# Altium PCB PCB_ESPHome Fan.pcbdoc
Units mm, origin at the board's own origin, x right, y up, seen from the top; angles counter-clockwise.
Board outline 99.65 x 76.12 mm, 2 copper layers (Top Layer, Bottom Layer); 13 components, 55 nets, 91 pads, 0 vias.
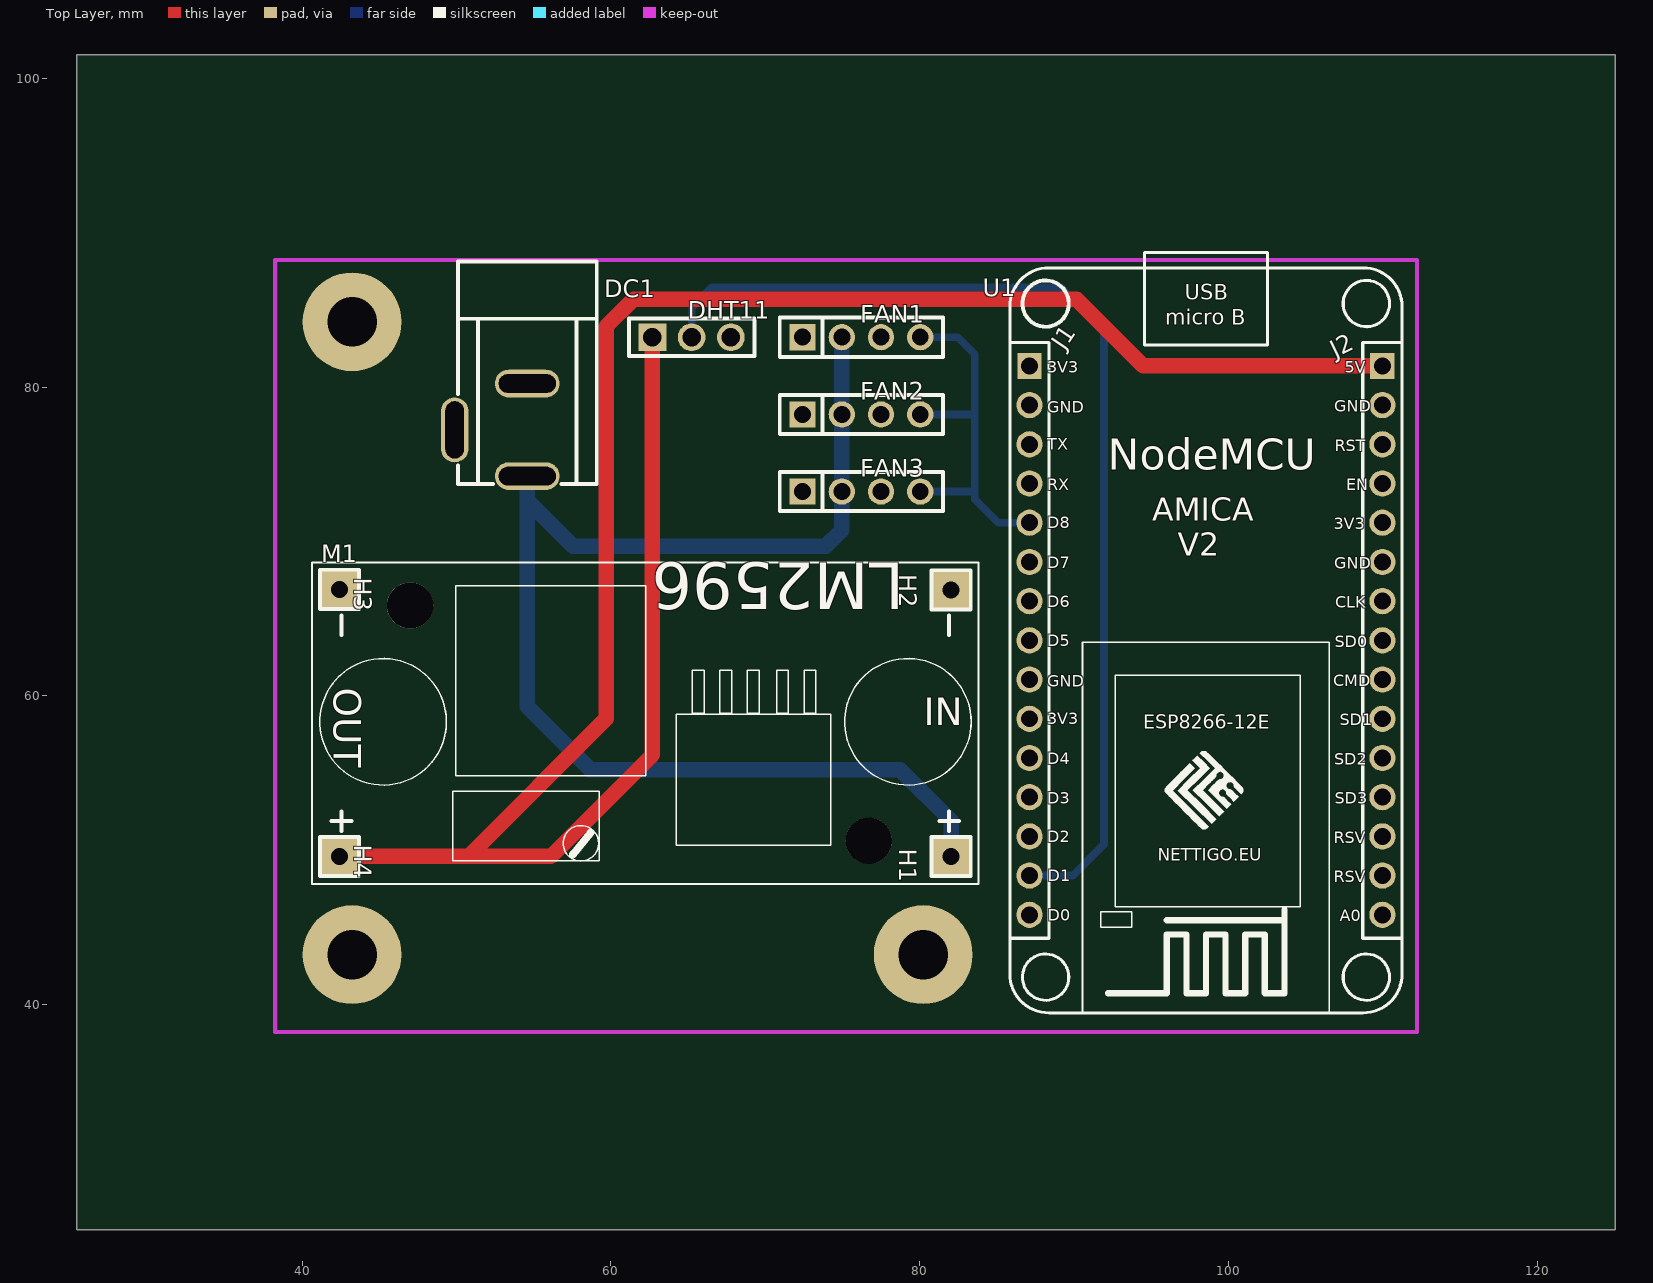
[diagram p0: Top Layer view]
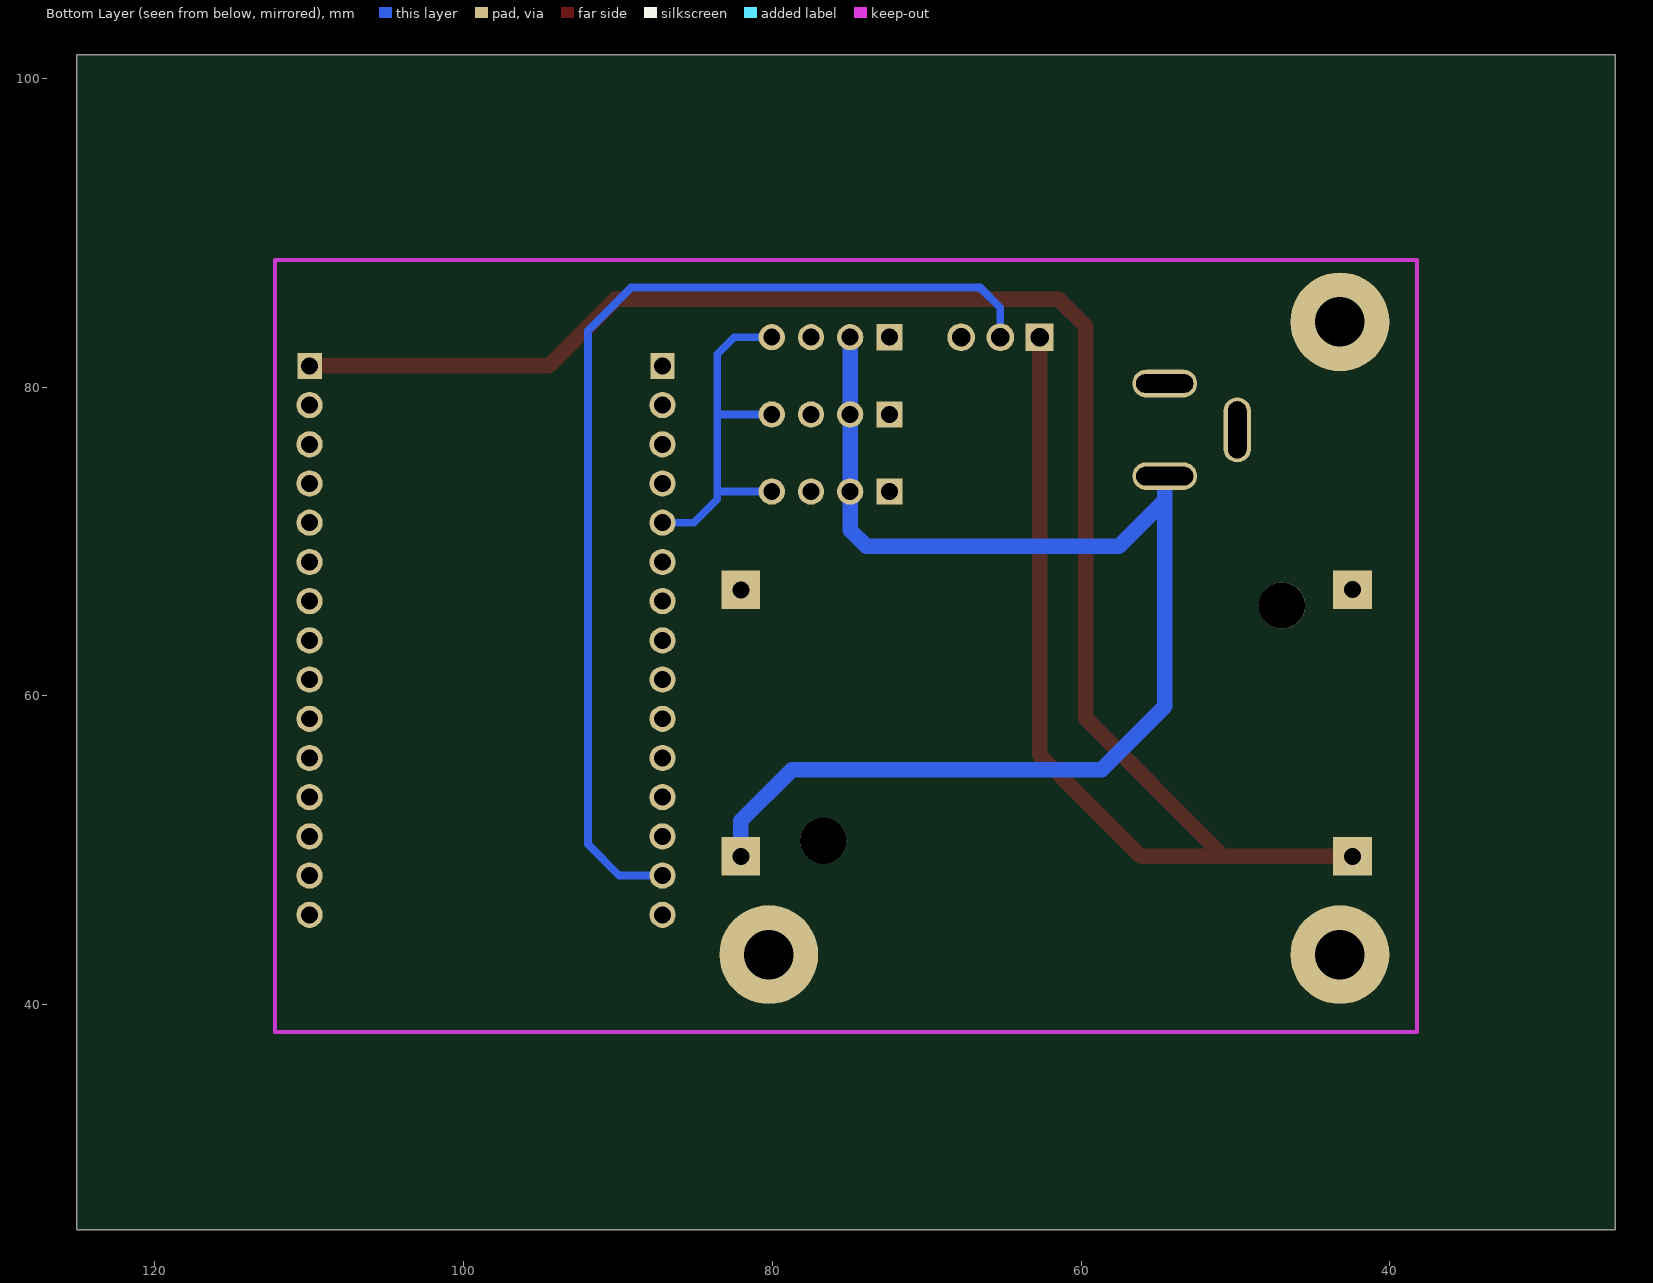
[diagram p1: Bottom Layer view, seen from below]

## Layer stack, top to bottom
Top Layer: signal copper (thickness not stored)
Dielectric: dielectric 0.32, FR-4, Dk 4.8
Bottom Layer: signal copper (thickness not stored)

## Board outline
125.054,25.4 25.4,25.4 25.4,101.518 125.054,101.518

## Components (designator, comment, footprint, x,y, rotation, side; value= is the part's Value field where it differs from the comment)
DC1 "DC-005-2.5A-2.5" CONN-TH_DC-005-2.5A-2.0 52.227,77.227 r270 top
DHT11 "A2541HWV-3P" HDR-TH_3P-P2.54-V-F-1 65.227,83.227 r0 top
FAN1 "MH254V-11-04-1000" HDR-TH_4P-P2.54-V-M-3 76.227,83.227 r0 top
FAN2 "MH254V-11-04-1000" HDR-TH_4P-P2.54-V-M-3 76.227,78.227 r0 top
FAN3 "MH254V-11-04-1000" HDR-TH_4P-P2.54-V-M-3 76.227,73.227 r0 top
H1 "68000-200HLF" HDR-TH_1P-P2.54-V-M 82.039,49.591 r270 top
H2 "68000-200HLF" HDR-TH_1P-P2.54-V-M 82.039,66.863 r270 top
H3 "68000-200HLF" HDR-TH_1P-P2.54-V-M 42.415,66.891 r270 top
H4 "68000-200HLF" HDR-TH_1P-P2.54-V-M 42.415,49.591 r270 top
J1 "PM254-1-15-Z-8.5" HDR-TH_15P-P2.54-V-F 87.119,63.589 r270 top
J2 "PM254-1-15-Z-8.5" HDR-TH_15P-P2.54-V-F 109.979,63.589 r270 top
M1 "LM2596_BUCK_4-40V>1.25-35V_1-3A" "DC-DC BUCK LM2596" 62.227,58.227 r180 top
U1 "NodeMCU ESP8266-12E Amica V2" "MY_NODEMCU ESP8266-12E AMICA V2" 87.119,81.369 r0 top

## Footprints (in the part's own frame and the unit in brackets; to place one, negate y for a bottom-side part, rotate by r counter-clockwise, add the part's x,y. Pads: shape width x height; smd on the part's side, far side on the other; paste and mask are expansions set on the pad)
CONN-TH_DC-005-2.5A-2.0 [mm]
  oval 1.8x4.2 hole 1.2 slot 3.7 at 90 deg: 1(3,2.35) 2(-3,2.35)
  oval 4.2x1.8 hole 1.2 slot 3.7 at 0 deg: 3(0,-2.35)
  silkscreen extent -10.9,-2.15 3.5,6.85
"DC-DC BUCK LM2596" [mm]
  rect 2.5x2.5 hole 1: 1(-19.812,8.636) 2(-19.812,-8.636) 3(19.812,-8.636) 4(19.812,8.636)
  round 3 hole 3 unplated: ""(-14.478,7.62) ""(15.24,-7.62)
  silkscreen extent -21.59,-10.41 21.59,10.41
HDR-TH_1P-P2.54-V-M [mm]
  rect 1.7x1.7 hole 1.1: 1(0,0)
  silkscreen extent -1.27,-1.27 1.27,1.27
HDR-TH_3P-P2.54-V-F-1 [mm]
  rect 1.8x1.8 hole 1.2: 1(-2.54,0)
  round 1.8 hole 1.2: 2(0,0) 3(2.54,0)
  silkscreen extent -4.06,-1.22 4.06,1.22
HDR-TH_4P-P2.54-V-M-3 [mm]
  rect 1.7x1.7 hole 1.1: 1(-3.81,0)
  round 1.7 hole 1.1: 2(-1.27,0) 3(1.27,0) 4(3.81,0)
  silkscreen extent -5.29,-1.27 5.29,1.27
HDR-TH_15P-P2.54-V-F [mm]
  rect 1.7x1.575 hole 1.1: 1(-17.78,0)
  round 1.7 hole 1.1: 2(-15.24,0) 3(-12.7,0) 4(-10.16,0) 5(-7.62,0) 6(-5.08,0) 7(-2.54,0) 8(0,0) 9(2.54,0) 10(5.08,0) 11(7.62,0) 12(10.16,0) 13(12.7,0) 14(15.24,0) 15(17.78,0)
  silkscreen extent -19.3,-1.27 19.3,1.27
"MY_NODEMCU ESP8266-12E AMICA V2" [mil]
  rect 60x60 hole 36: 1(-0.1,-0.1)
  round 60 hole 36: 2(0,-100) 3(0,-200) 4(0,-300) 5(0,-400) 6(0,-500) 7(0,-600) 8(0,-700) 9(0,-800) 10(0,-900) 11(0,-1000) 12(0,-1100) 13(0,-1200) 14(0,-1300) 15(0,-1400) 16(900,-1400) 17(900,-1300) 18(900,-1200) 19(900,-1100) 20(900,-1000) 21(900,-900) 22(900,-800) 23(900,-700) 24(900,-600) 25(900,-500) 26(900,-400) 27(900,-300) 28(900,-200) 29(900,-100) 30(900,0)
  silkscreen extent -50,-1650 950,289

## Free pads (board coordinates)
  round 6.4 hole 3.2: 1(43.227,43.227) 1(43.227,84.227) 1(80.227,43.227)

## Nets (pads, with @x,y where several pads share a name; then routed paths per layer and width w, separated by ;. In a path a pad name is that pad's centre, name@x,y a point inside that pad or via, vN(x,y) a via of type N, cw(c..) or ccw(c..) an arc to the next point about the centre after c; other vN are vias at no path point)
+5V: DHT11.1 H4.1 J2.1 M1.4 U1.30 | length 141.4
  Top Layer w1: H4.1 50.769,49.591 59.687,58.509 59.687,72.225 59.687,83.909 61.465,85.687 90.167,85.687 94.485,81.369 J2.1 ; 50.289,49.591 56.103,49.591 62.687,56.175 DHT11.1
DHT11: DHT11.2 J1.14 U1.14 | length 69.3
  Bottom Layer w0.5: DHT11.2 65.227,85.131 66.545,86.449 89.151,86.449 91.945,83.655 91.945,50.381 89.913,48.349 J1.14
FAN1_3: FAN1.3
FAN2_3: FAN2.3
FAN3_3: FAN3.3
FAN_PWM: FAN1.4 FAN2.4 FAN3.4 J1.5 U1.5 | length 24.4
  Bottom Layer w0.5: FAN3.4 83.563,73.227 ; FAN2.4 83.309,78.227 ; FAN1.4 82.467,83.227 83.563,82.131 83.563,72.733 85.087,71.209 J1.5
GND: DC1.2 DC1.3 DHT11.3 FAN1.1 FAN2.1 FAN3.1 H2.1 J1.2 J1.9 J2.2 J2.6 M1.2 M1.3 U1.2 U1.9 U1.25 U1.29
H3_1: H3.1
J1_1: J1.1
J1_3: J1.3
J1_4: J1.4
J1_6: J1.6
J1_7: J1.7
J1_8: J1.8
J1_10: J1.10
J1_11: J1.11
J1_12: J1.12
J1_13: J1.13
J1_15: J1.15
J2_3: J2.3
J2_4: J2.4
J2_5: J2.5
J2_7: J2.7
J2_8: J2.8
J2_9: J2.9
J2_10: J2.10
J2_11: J2.11
J2_12: J2.12
J2_13: J2.13
J2_14: J2.14
J2_15: J2.15
U1_1: U1.1
U1_3: U1.3
U1_4: U1.4
U1_6: U1.6
U1_7: U1.7
U1_8: U1.8
U1_10: U1.10
U1_11: U1.11
U1_12: U1.12
U1_13: U1.13
U1_15: U1.15
U1_16: U1.16
U1_17: U1.17
U1_18: U1.18
U1_19: U1.19
U1_20: U1.20
U1_21: U1.21
U1_22: U1.22
U1_23: U1.23
U1_24: U1.24
U1_26: U1.26
U1_27: U1.27
U1_28: U1.28
VCC: DC1.1 FAN1.2 FAN2.2 FAN3.2 H1.1 M1.1 | length 82.3
  Bottom Layer w1: 54.576,72.652 57.543,69.685 73.911,69.685 74.957,70.731 FAN3.2 ; DC1.1 54.576,59.301 58.671,55.207 78.737,55.207 82.039,51.905 H1.1 ; FAN3.2 FAN2.2 FAN1.2
pads on no net: M1.

## Polygon pours and split planes (outlines as drawn)
GND on Bottom Layer (solid): 38.351,88.227 38.351,38.189 112.265,38.189 112.265,88.227
GND on Top Layer (solid): 38.351,88.227 38.351,38.189 112.265,38.189 112.265,88.227 112.011,88.227

## Silkscreen, mask and mechanical layers (free items; w line width, h text height)
Document:
  lines w0.003: 75.227,63.459 75.227,63.459

## Text inside footprints (layer, text, board x,y; h text height)
M1: Top Overlay "IN" at 80.261,58.1 h1.78; Top Overlay "OUT" at 42.034,60.513 h1.78 r270; Top Overlay "LM2596" at 78.991,68.617 h3 r180
U1: Top Overlay "USB" at 97.16,85.667 h1; Top Overlay "NodeMCU" at 92.181,74.636 h2; Top Overlay "5V" at 107.543,80.935 h0.76; Top Overlay "GND" at 106.865,78.395 h0.76; Top Overlay "GND" at 88.264,78.346 h0.76; Top Overlay "GND" at 88.264,60.594 h0.76; Top Overlay "GND" at 106.865,68.235 h0.76; Top Overlay "3V3" at 88.264,80.935 h0.76; Top Overlay "3V3" at 88.264,58.151 h0.76; Top Overlay "3V3" at 106.829,70.775 h0.76; Top Overlay "TX" at 88.264,75.949 h0.76; Top Overlay "RX" at 88.264,73.299 h0.76; Top Overlay "D8" at 88.264,70.836 h0.76; Top Overlay "D7" at 88.264,68.247 h0.76; Top Overlay "D6" at 88.264,65.745 h0.76; Top Overlay "D5" at 88.264,63.216 h0.76; Top Overlay "D4" at 88.264,55.547 h0.76; Top Overlay "D3" at 88.264,53.007 h0.76; Top Overlay "D2" at 88.264,50.516 h0.76; Top Overlay "D1" at 88.287,47.968 h0.76; Top Overlay "RST" at 106.898,75.855 h0.76; Top Overlay "EN" at 107.647,73.315 h0.76; Top Overlay "CLK" at 106.933,65.695 h0.76; Top Overlay "SD0" at 106.898,63.155 h0.76; Top Overlay "CMD" at 106.794,60.615 h0.76; Top Overlay "SD1" at 107.21,58.075 h0.76; Top Overlay "SD2" at 106.865,55.535 h0.76; Top Overlay "SD3" at 106.898,52.995 h0.76; Top Overlay "RSV" at 106.829,50.455 h0.76; Top Overlay "RSV" at 106.829,47.915 h0.76; Top Overlay "A0" at 107.21,45.375 h0.76; Top Overlay "ESP8266-12E" at 94.485,57.853 h0.9; Top Overlay "AMICA" at 95.069,71.333 h1.5; Top Overlay "micro B" at 95.912,84.036 h1; Top Overlay "V2" at 96.715,69.077 h1.5; Top Overlay "D0" at 88.287,45.428 h0.76; Top Overlay "NETTIGO.EU" at 95.432,49.308 h0.8